# Altium PCB LED_Adapter.PcbDoc
Units mil, origin at the board's own origin, x right, y up, seen from the top; angles counter-clockwise.
Board outline 679.13 x 787.4 mil, 2 copper layers (Top Layer, Bottom Layer); 3 components, 9 nets, 18 pads, 0 vias.
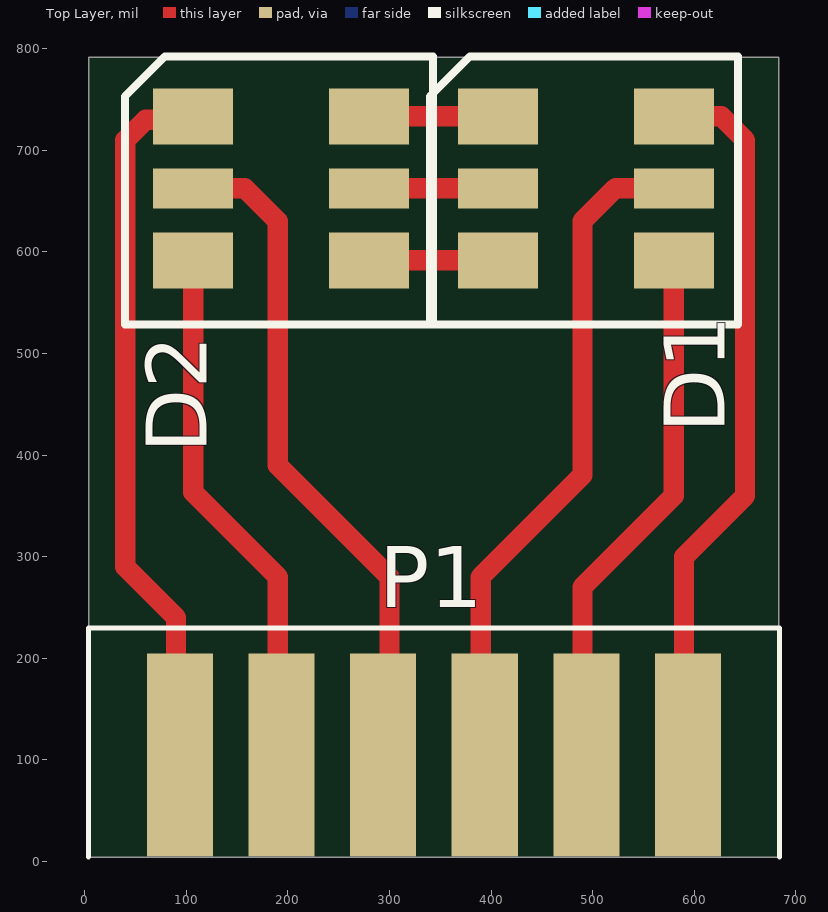
[diagram p0: Top Layer view]
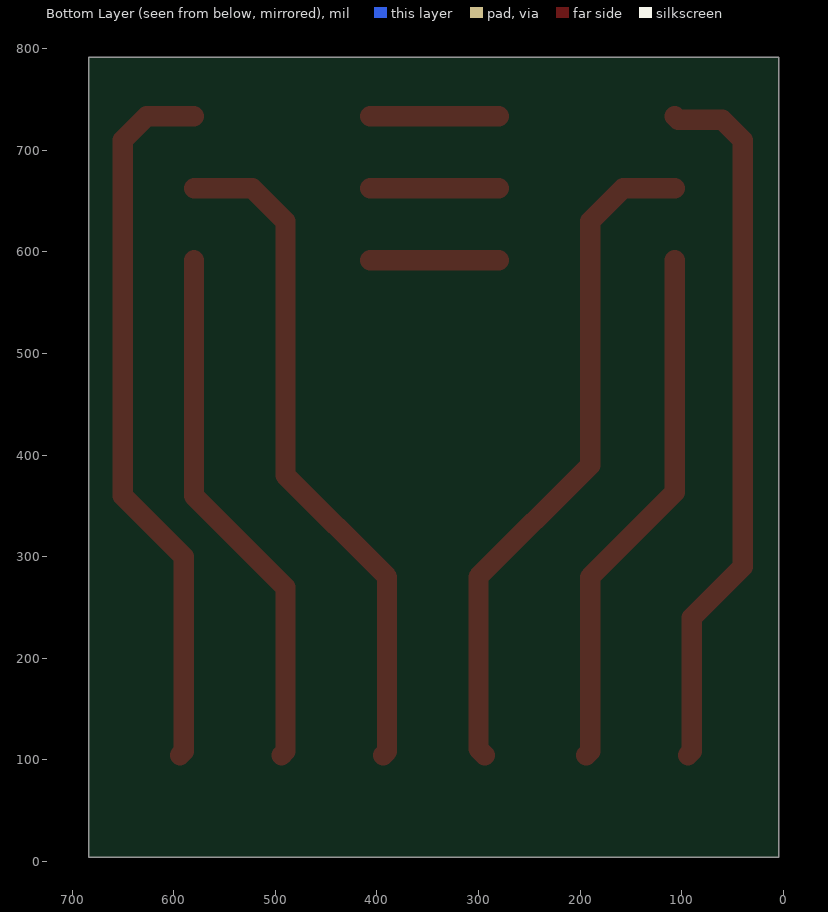
[diagram p1: Bottom Layer view, seen from below]

## Layer stack, top to bottom
Top Layer: signal copper 1.4
Dielectric: dielectric 12.6, FR-4, Dk 4.8
Bottom Layer: signal copper 1.4

## Board outline
4.25,4.25 683.39,4.25 683.39,791.65 4.25,791.65

## Design rules (kind name [scope] priority, off if disabled: settings)
Clearance [All] p1: gap=10
PolygonConnect [All] p1: connectstyle=Relief reliefconductorwidth=10 reliefentries=4 polygonreliefangle="90 Angle"
RoutingVias [All] p1: holewidth=28 width=50 viastyle="Through Hole" minholewidth=28 minwidth=50 maxholewidth=28 maxwidth=50
SilkscreenOverComponentPads [All] p1: minsilkscreentomaskgap=10
SolderMaskExpansion [All] p1: expansion=4
Width [All] p1: maxlimit=50 minlimit=10 preferedwidth=20 minimp=50.000000 maximp=50.000000 favimp=50.000000
27 further rules are at their usual default settings.

## Components (designator, comment, footprint, x,y, rotation, side; value= is the part's Value field where it differs from the comment)
D1 "LED 5050" PLCC6 580,591.65 r90 top
D2 "LED 5050" PLCC6 280,591.65 r90 top
P1 "BoardEdge 6P" "BoardEdge Layout 12P Single Side M" 93.82,104.65 r0 top

## Footprints (in the part's own frame and the unit in brackets; to place one, negate y for a bottom-side part, rotate by r counter-clockwise, add the part's x,y. Pads: shape width x height; smd on the part's side, far side on the other; paste and mask are expansions set on the pad)
"BoardEdge Layout 12P Single Side M" [mil] "Layout Board Edge Connector  TE 7-5530843-6"
  rect 65x200 smd: 1(0,0) 2(100,0) 3(200,0) 4(300,0) 5(400,0) 6(500,0)
  silkscreen extent -90,-100 590,125
PLCC6 [mm] "PLCC-6, 6leads, LED"
  rect 1.4x2 smd: 1(0,4.4) 2(0,0) 5(3.6,4.4) 6(3.6,0)
  rect 1x2 smd: 3(1.8,4.4) 4(1.8,0)
  silkscreen extent -1.6,-1.6 5.1,6.1, body extent -0.95,-0.5 4.55,5, height 2.59

## Part data
D1 D2: library part "LED RGB 5050", "SMD PLCC-6 20mA 5050"
P1: library part "BoardEdge Layout  SS 6P", "Layout BoardEdge 6P Single Side TE 7-5530843-6"

## Nets (pads, with @x,y where several pads share a name; then routed paths per layer and width w, separated by ;. In a path a pad name is that pad's centre, name@x,y a point inside that pad or via, vN(x,y) a via of type N, cw(c..) or ccw(c..) an arc to the next point about the centre after c; other vN are vias at no path point)
NetD1_1: D1.1 D2.2 | length 126.8
  Top Layer w20: D2.2 D1.1
NetD1_2: D1.2 P1.5 | length 525.9
  Top Layer w20: P1.5 490,108.46 490,270 580,360 D1.2
NetD1_3: D1.3 D2.4 | length 126.8
  Top Layer w20: D2.4 D1.3
NetD1_4: D1.4 P1.4 | length 671.8
  Top Layer w20: P1.4 390,108.46 390,280 490,380 490,630 522.52,662.52 D1.4
NetD1_5: D1.5 D2.6 | length 126.8
  Top Layer w20: D2.6 D1.5
NetD1_6: D1.6 P1.6 | length 711.5
  Top Layer w20: D1.6 626.61,733.39 650,710 650,360 590,300 590,108.46 P1.6
NetD2_1: D2.1 P1.2 | length 523.1
  Top Layer w20: D2.1 106.77,363.23 190,280 190,108.46 P1.2
NetD2_3: D2.3 P1.3 | length 670.2
  Top Layer w20: D2.3 157.48,662.52 190,630 190,390 300,280 300,110.83 P1.3
NetD2_5: D2.5 P1.1 | length 704.1
  Top Layer w20: P1.1 90,108.46 90,240 40,290 40,710 60,730 103.39,730 D2.5

## Silkscreen, mask and mechanical layers (free items; w line width, h text height)
Mechanical 1:
  the board outline again, w5